# EAGLE board Tapuino 1.5 (EAGLE 7.1.0)
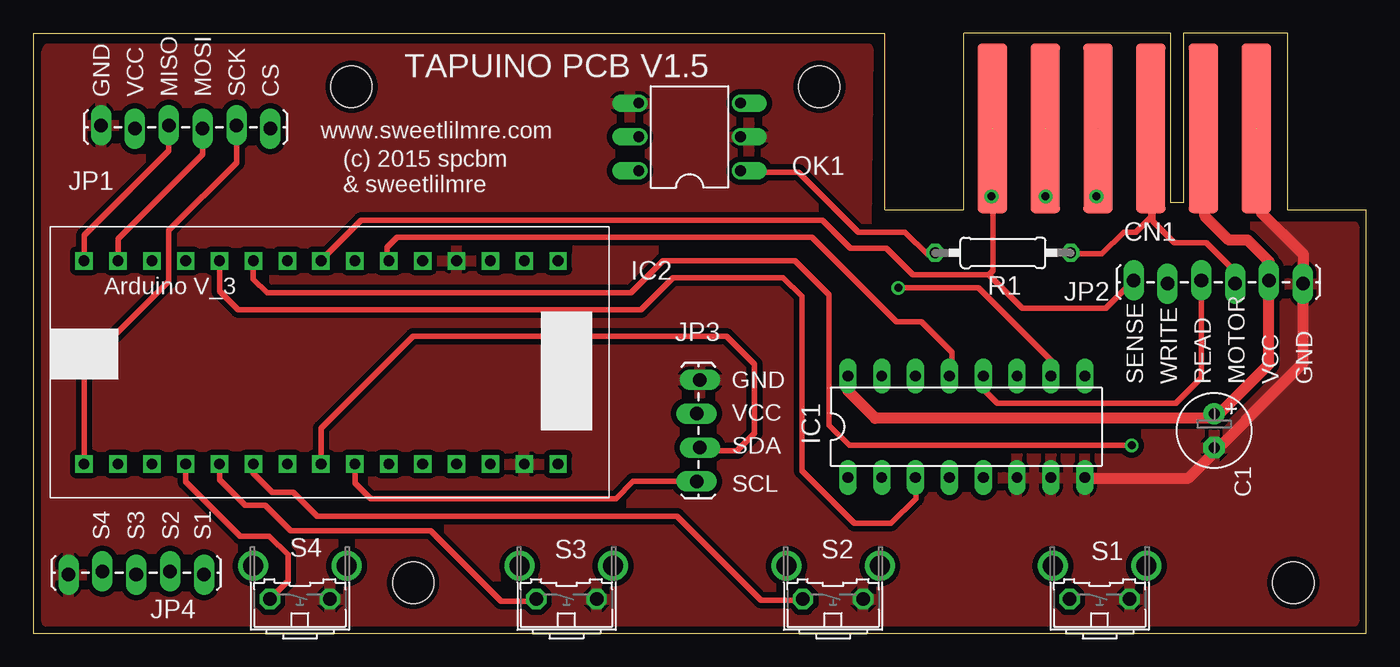
[diagram p0: board, top side]
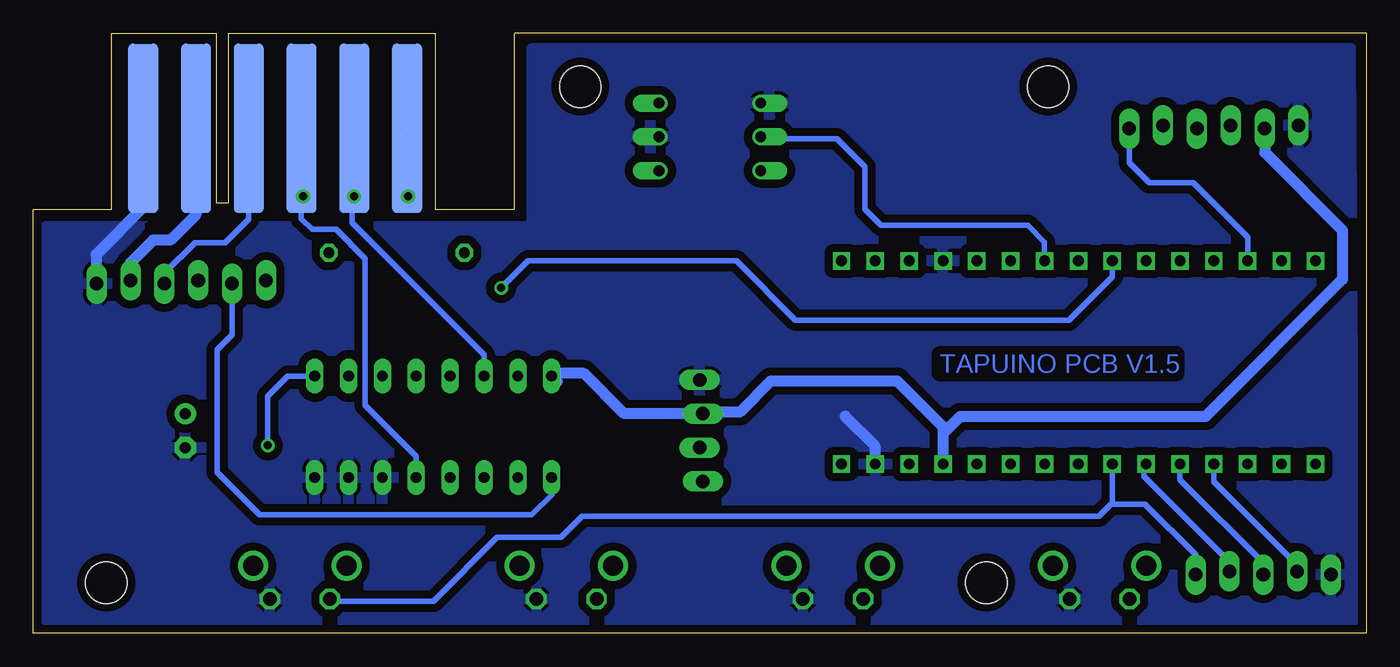
[diagram p1: board, bottom side, seen from below]

Size 100 x 45 mm. Coordinates in mm from the lower left corner, seen from the top.
Outline: 94.11,31.78 100,31.78 100,0 0,0 0,45 63.88,45 63.88,31.78 69.77,31.78
Copper layers (1*16): Top 0.035mm / dielectric 1.5mm / Bottom 0.035mm
Design rules "ITEADstudio_DRC": minimum track width 6mil, minimum drill 12mil, track to track 6mil, track to pad 6mil, pad to pad 6mil, via to via 6mil, smd to smd 0mil, copper to edge 10mil, drill to drill 10mil, minimum pad ring 10mil, minimum via ring 6mil, stop-mask expansion 2mil, vias tented up to drill 100mil, thermal gap 10mil
Net classes: 0 default: width 0.254 mm, clearance 0.254 mm; 1 GND: width 0.762 mm, clearance 0.381 mm; 2 VCC: width 0.762 mm, clearance 0.381 mm
Holes 3.1 mm at 28.5,3.8 94.53,3.8 58.97,41 23.87,41

## Footprints (pad centres in the part's own frame; a part is rotated, then mirrored left to right if it is on the bottom)
E2,5-6 = drill 0.813 pad 1.6: + -1.27,0 | drill 0.813 pad 1.6 octagon: - 1.27,0
C64_CASSETTE = smd 2.2 x 12.7: 1 -21.779,-0.5; 2 -17.819,-0.5; 3 -13.859,-0.5; 4 -9.899,-0.5; 5 -5.939,-0.5; 6 -1.979,-0.5 | smd 2.2 x 12.7 bottom: A -21.779,-0.5; B -17.819,-0.5; C -13.859,-0.5; D -9.899,-0.5; E -5.939,-0.5; F -1.979,-0.5
DIL16 = drill 0.813 long: 1 -8.89,-3.81; 2 -6.35,-3.81; 3 -3.81,-3.81; 4 -1.27,-3.81; 5 1.27,-3.81; 6 3.81,-3.81; 7 6.35,-3.81; 8 8.89,-3.81; 9 8.89,3.81; 10 6.35,3.81; 11 3.81,3.81; 12 1.27,3.81; 13 -1.27,3.81; 14 -3.81,3.81; 15 -6.35,3.81; 16 -8.89,3.81
NANO_V3 = drill 0.8 square: 1 -7.62,1.27; 2 -5.08,1.27; 3 -2.54,1.27; 4 0,1.27; 5 2.54,1.27; 6 5.08,1.27; 7 7.62,1.27; 8 10.16,1.27; 9 12.7,1.27; 10 15.24,1.27; 11 17.78,1.27; 12 20.32,1.27; 13 22.86,1.27; 14 25.4,1.27; 15 27.94,1.27; 16 27.94,-13.97; 17 25.4,-13.97; 18 22.86,-13.97; 19 20.32,-13.97; 20 17.78,-13.97; 21 15.24,-13.97; 22 12.7,-13.97; 23 10.16,-13.97; 24 7.62,-13.97; 25 5.08,-13.97; 26 2.54,-13.97; 27 0,-13.97; 28 -2.54,-13.97; 29 -5.08,-13.97; 30 -7.62,-13.97
1X06_LOCK_LONGPADS = drill 1.016 long: 1 0,0; 2 2.54,-0.254; 3 5.08,0; 4 7.62,-0.254; 5 10.16,0; 6 12.7,-0.254
1X04_LOCK_LONGPADS = drill 1.016 long: 1 0,0; 2 2.54,-0.254; 3 5.08,0; 4 7.62,-0.254
1X05_LOCK_LONGPADS = drill 1.016 long: 1 0,0; 2 2.54,-0.254; 3 5.08,0; 4 7.62,-0.254; 5 10.16,0
DIL06 = drill 0.813 offset: 1 -2.54,-3.81; 2 0,-3.81; 3 2.54,-3.81; 4 2.54,3.81; 5 0,3.81; 6 -2.54,3.81
0207/10 = drill 0.813 octagon: 1 -5.08,0; 2 5.08,0
B3F-31XX = drill 1.016 octagon: 1 -2.261,-1.245; 2 2.261,-1.245 | drill 1.499 pad 2.159: 3 -3.505,1.245; 4 3.505,1.245

## Placement (x,y rotation side)
C1  [E2,5-6]  88.6,15.2 270 top
CN1  C64_CASETTE_EDGE  [C64_CASSETTE]  69.98,37.37 180 top
IC1  4052N  [DIL16]  70,15.49 0 top
IC2  ARDUINO_NANO_V3  [NANO_V3]  31.75,13.97 180 top
JP1  SD_SHIELD  [1X06_LOCK_LONGPADS]  5.08,38.1 0 top
JP2  C64 CON  [1X06_LOCK_LONGPADS]  95.25,26.22 180 top
JP3  LCD_SHIELD  [1X04_LOCK_LONGPADS]  50.02,19.02 270 top
JP4  [1X05_LOCK_LONGPADS]  12.8,4.4 180 top
OK1  4N35  [DIL06]  49.23,37.23 90 top
R1  330  [0207/10]  72.75,28.54 0 top
S1  SELECT  [B3F-31XX]  80,3.81 0 top
S2  ABORT/BACK  [B3F-31XX]  60,3.81 0 top
S3  PREV  [B3F-31XX]  40,3.81 0 top
S4  NEXT  [B3F-31XX]  20,3.81 0 top

## Library data of the parts
C1 R1 = resistor
CN1 = commodore MOD
IC1 = 40xx
IC2 = arduino
JP1-JP4 = SparkFun
OK1 = optocoupler; MF: FAIRCHILD SEMICONDUCTOR; MPN: 4N35; OC_FARNELL: 1328375; OC_NEWARK: 72K9946
S1-S4 = switch-omron; MPN: B3F-3100; OC_FARNELL: 959704; OC_NEWARK: 36M3582

## Nets
GND [GND]: C1.- CN1.1 CN1.A IC1.6 IC1.7 IC1.8 IC2.2 IC2.27 JP1.1 JP2.1 JP3.1 JP4.5 OK1.2 OK1.4 S1.2 S2.2 S3.2 S4.2
N$1: IC2.16 JP1.3
N$2: IC2.18 JP1.6
N$3: IC2.15 JP1.5
N$4: IC2.17 JP1.4
N$5: IC2.7 JP3.4
N$6: IC2.8 JP3.3
N$7: IC2.9 JP4.1 S1.1
N$8: OK1.1 R1.1
N$9: IC2.12 JP4.4 S4.1
N$10: IC2.24 OK1.5
N$11: IC2.11 JP4.3 S3.1
N$13: IC1.1 JP2.5
N$14: CN1.3 CN1.C JP2.3 R1.2
N$15: IC1.3 IC2.20
N$16: IC1.12 JP2.4
N$17: CN1.6 CN1.F IC2.23 JP2.6
N$18: IC1.13 IC2.25
N$19: CN1.4 CN1.D IC1.5
N$20: IC1.9 IC2.21
N$21: CN1.5 CN1.E IC1.14
N$22: IC1.10 IC2.22
N$23: IC2.10 JP4.2 S2.1
VCC [VCC]: C1.+ CN1.2 CN1.B IC1.16 IC2.4 JP1.2 JP2.2 JP3.2

## Tracks (layer width: path | path; a pad name or v marks a point on that pad's centre or on a via)
GND  (1 unrouted)
  Top 0.813: 79.07,11.5 IC1.8 78.97,11.6 86.6,11.6 95.25,20.25 JP2.1 | 95.2,25.9 95.3,26 | 95.3,26 95.4,26.1 | 95.3,26 95.3,28.4 92.1,31.6 92.1,37.53 CN1.A
  Bottom 0.813: 95.25,27.05 JP2.1 95.3,26.27 95.3,28.4 91.76,31.94 CN1.A | IC2.2 36.83,14.03 39.1,16.3
  pour Bottom (isolate 0.61): 1.14,43.85 62.61,43.85 62.61,30.5 99.06,30.5 99.06,1.02 0.89,1.02
  pour Top (isolate 0.406): 1.14,43.85 62.61,43.85 62.48,30.5 98.93,30.5 99.06,30.51 99.06,0.89 1.02,0.89 1.02,43.59
N$1
  Top 0.381: JP1.3 10.16,36.99
  Top 0.406: IC2.16 3.81,29.84 10.16,36.2 JP1.3
N$2
  Bottom 0.406: IC2.18 8.89,29.72 12.95,33.78 16.26,33.78 17.78,35.31 JP1.6
N$3
  Top 0.406: IC2.15 3.81,20.07 10.16,26.42 10.16,30.23 15.24,35.31 JP1.5
N$4
  Top 0.406: IC2.17 6.35,29.59 12.7,35.94 JP1.4
N$5
  Top 0.406: IC2.7 24.13,11.27 25.3,10.1 43.7,10.1 45,11.4 JP3.4
N$6
  Top 0.406: 49.95,14 JP3.3 50.25,13.7 52.8,13.7 54.1,15 54.1,20.2 52,22.3 28.5,22.3 21.6,15.4 IC2.8
N$7
  Bottom 0.406: IC2.9 19.05,9.78 | 19.05,9.78 20.07,8.76 58.84,8.76 60.4,7.2 65.19,7.2 69.98,2.41 77.59,2.41 S1.1 | JP4.1 12.8,5.9 16.6,9.7 18.97,9.7 19.05,9.78
N$8
  Top 0.406: OK1.1 53.05,34.6 57.4,34.6 61.9,30.1 65.4,30.1 67.1,28.4 67.53,28.4 R1.1
N$9
  Top 0.406: 17.64,2.67 S4.1 19.1,3.93 19.1,5.9 17.7,7.3 15.5,7.3 11.43,11.37 IC2.12
  Bottom 0.406: JP4.4 5.18,5.12 11.43,11.37 IC2.12
N$10
  Bottom 0.406: OK1.5 45.42,37.1 39.7,37.1 37.6,35 37.6,31.8 36.4,30.6 25.4,30.6 24.13,29.33 IC2.24
N$11
  Top 0.406: 37.71,2.54 S3.1 37.57,2.4 35.1,2.4 29.8,7.7 19.3,7.7 17.4,9.6 15.9,9.6 13.97,11.53 IC2.11
  Bottom 0.406: JP4.3 7.72,5.28 13.97,11.53 IC2.11
N$12  (via drill 0.6 pad 1.02)
  other vias: 71.88,32.77
N$13
  Bottom 0.406: JP2.5 85.09,22.38 86.2,21.27 86.2,12.06 83.03,8.89 62.61,8.89 61.1,10.4 IC1.1
N$14
  Top 0.406: JP2.3 90.17,27.13 88,29.3 85.6,29.3 84,30.9 84,37.2 | 84,37.2 84,37.71 CN1.C | 84,37.2 83.84,37.04 83.84,31.2 82.74,30.1 81.8,30.1 80.16,28.46 77.91,28.46
  Top 0.813: 77.91,28.46 R1.2
  Bottom 0.406: CN1.C 83.84,31.06 85.6,29.3 87.87,29.3 90.17,27 JP2.3
N$15
  Top 0.406: IC2.20 13.97,25.65 15.37,24.26 45.59,24.26 48.01,26.67 56.26,26.67 57.66,25.27 57.66,12.19 61.59,8.26 64.36,8.26 66.2,10.1 IC1.3
N$16
  Top 0.406: JP2.4 87.63,19.18 85.72,17.27 72.33,17.27 71.2,18.4 71.2,19.23 IC1.12
N$17  (1 unrouted)
  Top 0.406: CN1.F 71.96,33 | 71.96,33 71.96,32.69 72,32.65 | 71.7,26.9 66,26.9 64,28.9 61.3,28.9 59.2,31 24.6,31 21.59,27.99 IC2.23 | 71.7,26.9 74.2,24.4 80.47,24.4 JP2.6 | 71.96,33 72,32.96 72,27.2 71.7,26.9
N$18
  Top 0.406: IC2.25 26.54,28.07 26.54,28.96 27.3,29.72 58.42,29.72 64.77,23.37 66.63,23.37 68.9,21.1 68.9,19.47 IC1.13
N$19  (1 unrouted)
  Bottom 0.406: IC1.5 71.3,11.71 71.3,13.3 75.1,17.1 75.1,28.1 77.3,30.3 79.1,30.3 79.9,31.1 79.9,37.85 CN1.D
N$20  (via drill 0.6 pad 1.02)
  Top 0.406: IC2.21 16.51,26.54 17.53,25.53 44.83,25.53 47.24,27.94 57.15,27.94 59.69,25.4 59.69,15.62 61.21,14.1 v82.4,14.1
  Bottom 0.406: v82.4,14.1 82.4,17.8 80.9,19.3 IC1.9
N$21  (1 unrouted)
  Bottom 0.406: CN1.5 75.92,33.5 | 75.92,33.5 75.92,32.74 | 75.92,33.5 76.1,33.32 76.1,30.8 66.19,20.89 IC1.14
N$22  (via drill 0.6 pad 1.02)
  Top 0.406: v64.9,25.91 70.89,25.91 76.4,20.4 76.4,19.35 IC1.10
  Bottom 0.406: v64.9,25.91 62.87,27.94 47.24,27.94 42.8,23.5 22.3,23.5 19.05,26.75 IC2.22
N$23
  Top 0.406: 57.71,2.54 S2.1 57.67,2.5 54.6,2.5 48.3,8.8 21.3,8.8 19.5,10.6 17.9,10.6 16.51,11.99 IC2.10
  Bottom 0.406: JP4.2 10.26,5.36 16.7,11.8 16.7,12.51 IC2.10
N$24  (via drill 0.6 pad 1.02)
  other vias: 75.95,32.77
N$25  (via drill 0.6 pad 1.02)
  other vias: 79.76,32.77
VCC
  Top 0.813: 88.76,16.24 88.65,16.13 63.17,16.13 61.1,18.2 IC1.16 | 88.76,16.24 92.71,20.19 JP2.2 | JP2.2 92.71,26.04 | 87.8,32.5 CN1.2 87.9,37.77 87.9,31.3 89.7,29.5 91.1,29.5 92.71,27.89 JP2.2 | C1.+ 88.76,16.47 88.76,16.24
  Bottom 0.762: 7.62,36.67 JP1.2
  Bottom 0.813: 7.62,36.67 7.62,36.07 1.78,30.23 1.78,26.54 12.06,16.26 30.48,16.26 31.75,14.99 | 31.75,14.99 31.75,15.49 35.18,18.92 44.68,18.92 47,16.6 49.64,16.6 JP3.2 55.68,16.48 58.7,19.5 60.91,19.5 IC1.16 60.7,18.89 | 31.75,14.99 IC2.4 | 92.71,25.91 JP2.2 92.71,27.8 91.01,29.5 89.7,29.5 87.8,31.4 CN1.2

## Text on the board
Bottom: TAPUINO PCB V1.5
tPlace: GND | VCC | MISO | MOSI | SCK | CS | SENSE | WRITE | READ | MOTOR | VCC | GND | GND | VCC | SDA | SCL | S4 | S3 | S2 | S1
tNames: TAPUINO PCB V1.5 | www.sweetlilmre.com | (c) 2015 spcbm / & sweetlilmre